# Altium PCB Steering Wheel R3.PcbDoc
Units mm, origin at the board's own origin, x right, y up, seen from the top; angles counter-clockwise.
Board outline 99.95 x 50.04 mm, 4 copper layers (Top Layer, Int1 (GND), Int2 (PWR), Bottom Layer), stack 1.369 mm thick; 92 components, 74 nets, 314 pads, 8 vias.
Unrouted connection lines stored in the file: 151.
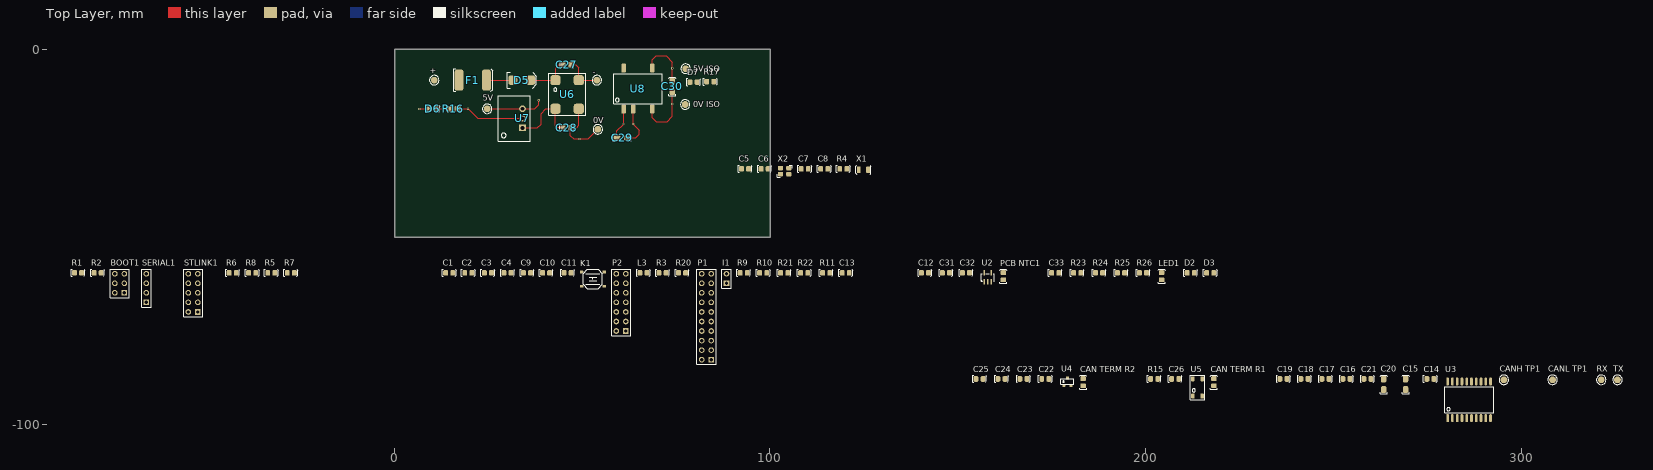
[diagram p0: Top Layer view]
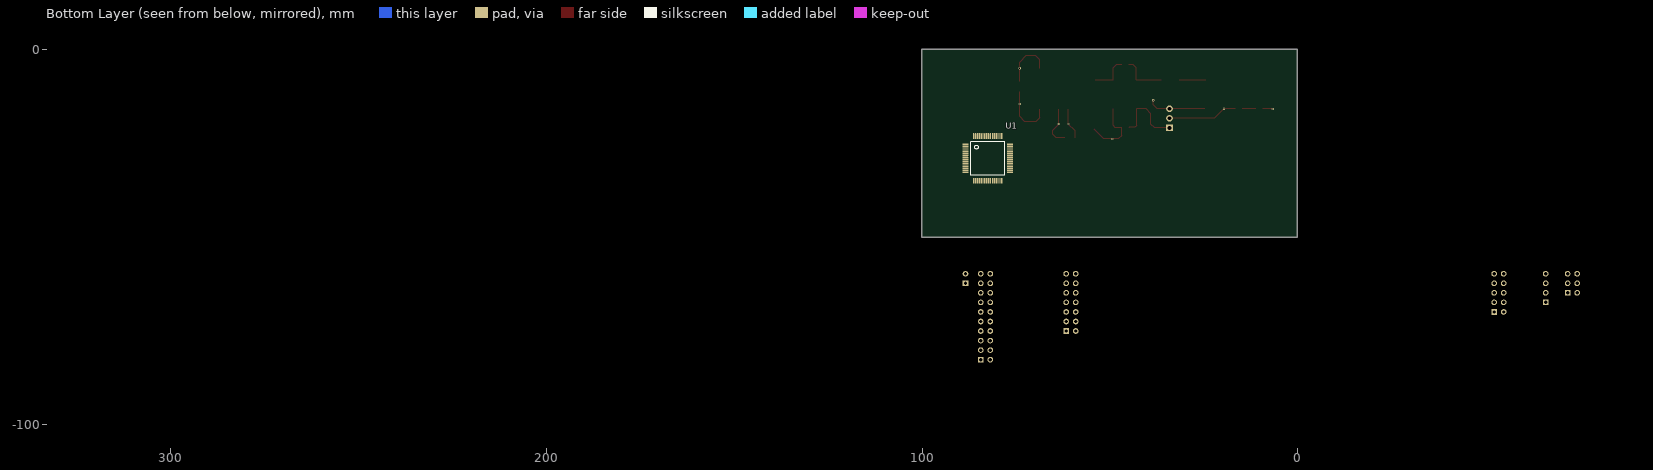
[diagram p1: Bottom Layer view, seen from below]
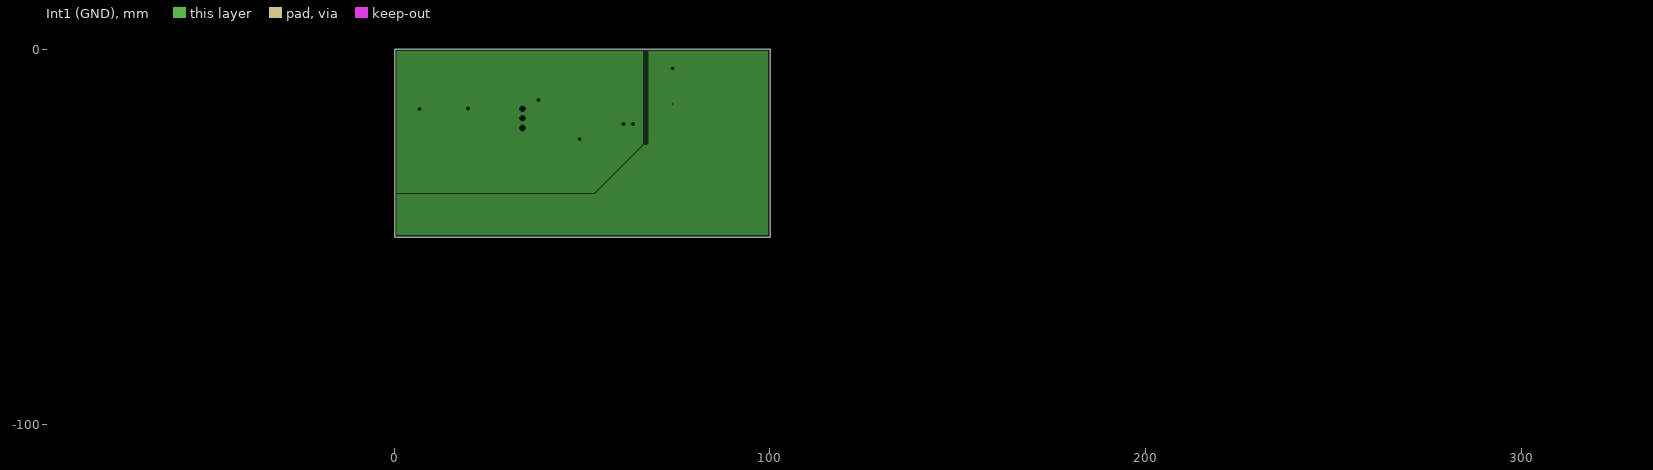
[diagram p2: Int1 (GND), clearances drawn from the general rule]
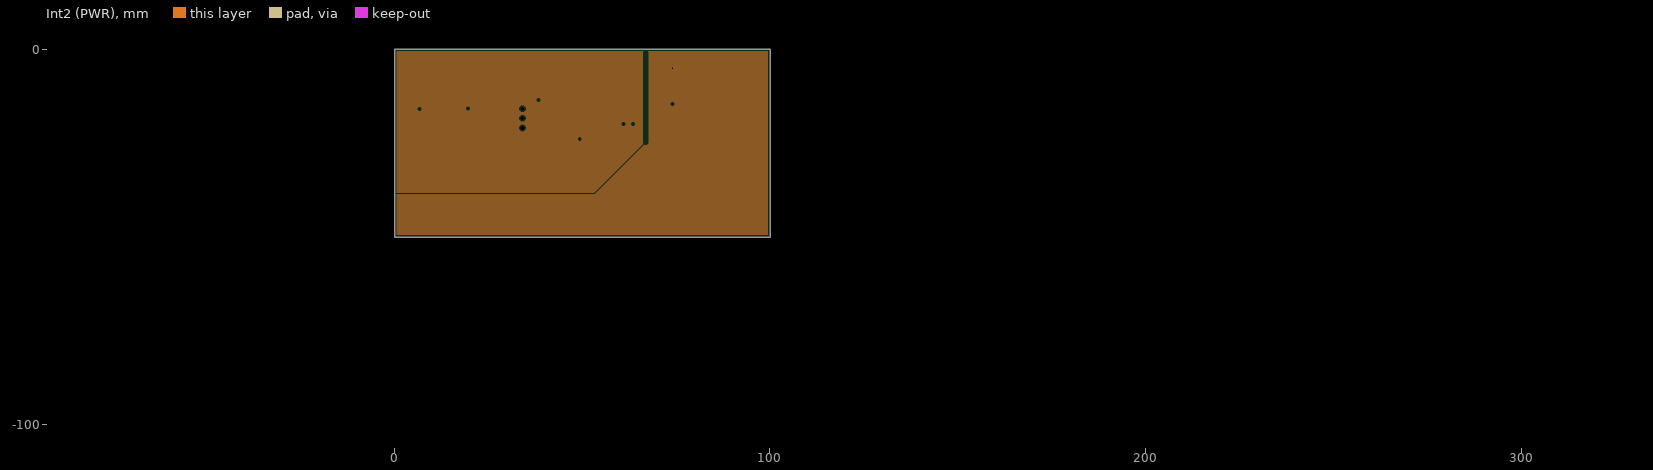
[diagram p3: Int2 (PWR), clearances drawn from the general rule]

## Layer stack, top to bottom
Top Solder: solder mask 0.0254, SM-001, Dk 4
Top Layer: signal copper 0.035
Dielectric 1: prepreg 0.1295, PP-017, Dk 4.3
Dielectric 2: prepreg 0.1295, PP-017, Dk 4.3
Int1 (GND): plane copper 0.035, net 0V (ISO)
Dielectric 3: core 0.7112, Core-039, Dk 4.8
Int2 (PWR): plane copper 0.035, net 5V (ISO)
Dielectric 4: prepreg 0.1295, PP-017, Dk 4.3
Dielectric 5: prepreg 0.1295, PP-017, Dk 4.3
Bottom Layer: signal copper 0.035
Bottom Solder: solder mask 0.0254, SM-001, Dk 4

## Board outline
0.127,-50.038 0.127,0 100.076,0 100.076,-50.038

## Design rules (kind name [scope] priority, off if disabled: settings)
Clearance [All] p1: gap=0.254 ignorepadtopadclearanceinfootprint=FALSE except(0: Arc-Hole Track-Hole SMDPad-Hole THPad-Hole Via-Hole Fill-Hole Poly-Hole Region-Hole Text-Hole; 0.1: THPad-THPad; 0.152: Arc-SMDPad Track-SMDPad SMDPad-SMDPad; 0.2: Arc-THPad Track-THPad SMDPad-THPad THPad-Via; 0.203: Arc-Arc Arc-Track Arc-Region Track-Track Track-Region SMDPad-Region THPad-Region Via-Region Fill-Region Poly-Region Region-Region; 0.6: Arc-Poly Track-Poly SMDPad-Poly THPad-Poly Via-Poly Fill-Poly Poly-Poly)
Height [All] p1: minheight=0 maxheight=50 prefheight=12.7
HoleSize [All] p1: absolutevalues=TRUE maxlimit=10 minlimit=0.025 maxpercent=80.000 minpercent=20.000
PlaneClearance [All] p1: clearance=0.4
PlaneConnect [All] p1: pad.planeconnectstyle=Relief pad.reliefexpansion=0.508 pad.reliefentries=4 pad.reliefconductorwidth=0.8 pad.reliefairgap=0.254 via.planeconnectstyle=Direct via.reliefexpansion=0.508 via.reliefentries=4 via.reliefconductorwidth=0.8 via.reliefairgap=0.254
PolygonConnect [All] p1: thpad.connectstyle=Relief thpad.reliefconductorwidth=0.6 thpad.reliefentries=4 thpad.polygonreliefangle="90 Angle" thpad.airgapwidth=0.254 smdpad.connectstyle=Relief smdpad.reliefconductorwidth=0.6 smdpad.reliefentries=4 smdpad.polygonreliefangle="90 Angle" smdpad.airgapwidth=0.254 via.connectstyle=Direct via.reliefconductorwidth=0.6 via.reliefentries=4 via.polygonreliefangle="90 Angle" via.airgapwidth=0.254
RoutingVias [All] p1: holewidth=0.711 width=1.27 viastyle="Through Hole" minholewidth=0.203 minwidth=0.254 maxholewidth=0.711 maxwidth=1.27
SolderMaskExpansion [All] p1: expansion=0.051 istentingtop=FALSE
Width [All] p1: maxlimit=3 minlimit=0.127 preferedwidth=0.5
26 further rules are at their usual default settings.

## Classes and differential pairs
net class MICROCONTROLLER: "0V (ISO)" "0V (ISO) (Crystal HS)" "0V (ISO) (Crystal LS)" "3.3V (ISO)" "5V (ISO)" BOOT0 BOOT1 "CAN RX" "CAN RX INDC" "CAN TX" "CAN TX INDC" GPIO1 GPIO2 GPIO3 GPIO4 GPIO5 GPIO6 GPIO7 GPIO8 GPIO9 GPIO10 GPIO11 GPIO12 GPIO13 GPIO14 GPIO15 GPIO16 GPIO17 NetC6_2 NetC9_2 NetC10_2 NetC13_2 NetD2_K NetD3_K NetK1_1 NetK1_3 NetL3_1 NetLED1_K NetR11_1 NetR20_2 NetSTLINK1_5 NetU1_2 NetU1_8 NetU1_9 NetU1_10 NetU1_11 NetU1_15 NetU1_20 NetU1_22 NetU1_23 NetU1_24 NetU1_25 NetU1_29 NetU1_37 NetU1_38 NetU1_39 NetU1_40 NetU1_41 NetU1_42 NetU1_43 NetU1_44 NetU1_45 NetU1_50 NetU1_51 NetU1_52 NetU1_53 NetU1_54 NetU1_55 NetU1_56 NetU1_62 NRST PA5 "PCB TEMP" SCL SDA SPI_MISO SPI_MOSI SPI_NSS SPI_SCLK SWCLK SWDIO UARTRX UARTTX XTALA XTALB XTALC XTALD
component class "Power Source": 0V "0V ISO" 5V "5V ISO" + - C27 C28 C29 C30 D5 D6 D7 F1 R16 R17 U6 U7 U8
component class Micro: BOOT1 C1 C2 C3 C4 C5 C6 C7 C8 C9 C10 C11 C12 C13 C31 C32 C33 D2 D3 I1 K1 L3 LED1 P1 P2 "PCB NTC1" R1 R2 R3 R4 R5 R6 R7 R8 R9 R10 R11 R20 R21 R22 R23 R24 R25 R26 SERIAL1 STLINK1 U1 U2 X1 X2
component class CAN: C14 C15 C16 C17 C18 C19 C20 C21 C22 C23 C24 C25 C26 "CAN TERM R1" "CAN TERM R2" "CANH TP1" "CANL TP1" R15 RX TX U3 U4 U5

## Components (designator, comment, footprint, x,y, rotation, side; value= is the part's Value field where it differs from the comment)
0V "0mm" "SMD Test Point" 54.229,-21.336 r0 top
"0V ISO" "0mm" "SMD Test Point" 77.47,-14.732 r90 top
5V "0mm" "SMD Test Point" 24.765,-15.875 r0 top
"5V ISO" "0mm" "SMD Test Point" 77.597,-5.207 r90 top
+ "0mm" "SMD Test Point" 10.668,-8.255 r0 top
- "0mm" "SMD Test Point" 53.975,-8.255 r0 top
BOOT1 "2.54mm" "TH 2.54mm Header 2x3" -71.809,-64.871 r90 top
C1 "100nF" 0805 14.678,-59.537 r0 top
C2 "100nF" 0805 19.758,-59.537 r0 top
C3 "100nF" 0805 24.965,-59.537 r0 top
C4 "100nF" 0805 30.172,-59.537 r0 top
C5 "12pF" 0805 93.418,-31.851 r0 top
C6 "12pF" 0805 98.625,-31.851 r0 top
C7 "22pF" 0805 109.293,-31.851 r0 top
C8 "22pF" 0805 114.5,-31.851 r0 top
C9 "2.2uF" 0805 35.379,-59.537 r0 top
C10 "2.2uF" 0805 40.459,-59.537 r0 top
C11 "1uF" 0805 46.174,-59.537 r0 top
C12 "1uF" 0805 141.297,-59.537 r0 top
C13 "22uF" 0805 120.215,-59.537 r0 top
C14 "100nF" 0805 275.844,-87.757 r0 top
C15 "10nF" 1206 269.24,-88.011 r90 top
C16 "100nF" 0805 253.492,-87.757 r0 top
C17 "10uF" 0805 247.904,-87.757 r0 top
C18 "100nF" 0805 242.316,-87.757 r0 top
C19 "10uF" 0805 236.728,-87.757 r0 top
C20 "10nF" 1206 263.398,-88.011 r90 top
C21 "100nF" 0805 259.08,-87.757 r0 top
C22 "100pF" 0805 173.355,-87.757 r0 top
C23 "100pF" 0805 167.513,-87.757 r0 top
C24 "100pF" 0805 161.671,-87.757 r0 top
C25 "100pF" 0805 155.829,-87.757 r0 top
C26 "22pF" 0805 207.899,-87.757 r0 top
C27 "10uF" 0805 45.974,-4.191 r180 top
C28 "10uF" 0805 45.92,-20.929 r180 top
C29 "22uF" 1206 61.909,-23.622 r0 top
C30 "22uF" 1206 74.041,-8.703 r90 top
C31 "100nF" 0805 146.885,-59.537 r0 top
C32 "1uF" 0805 152.219,-59.537 r0 top
C33 "100nF" 0805 175.968,-59.537 r0 top
"CAN TERM R1" "56R" 0805 218.186,-88.646 r90 top
"CAN TERM R2" "56R" 0805 183.388,-88.646 r90 top
"CANH TP1" "0mm" "SMD Test Point" 295.402,-88.011 r90 top
"CANL TP1" "0mm" "SMD Test Point" 308.356,-88.011 r90 top
D2 "Blue" "0805 LED" 212.036,-59.537 r0 top
D3 "Blue" "0805 LED" 217.243,-59.537 r0 top
D5 "SD560BTR" "SMB Diode" 31.877,-8.255 r0 top
D6 "Red" "0805 LED" 10.287,-15.875 r0 top
D7 "Red" "0805 LED" 79.707,-8.737 r0 top
F1 "0ZCF0100AF2A" 2920 17.272,-8.255 r0 top
I1 "2.54mm" "TH 2.54mm Header 1x2" 88.465,-62.331 r90 top
K1 "TS-1187A-C-D-B" "XKB SW-4.5" 52.905,-61.188 r0 top
L3 "Ferrite" 0805 66.367,-59.537 r0 top
LED1 "Yellow" "0805 LED" 204.289,-60.426 r90 top
P1 "2.54mm" "TH 2.54mm Header 2x10" 84.401,-82.651 r90 top
P2 "2.54mm" "TH 2.54mm Header 2x7" 61.668,-75.031 r90 top
"PCB NTC1" "10K (NTC) (B25/85 3430K)" 0805 162.125,-60.426 r90 top
R1 "0R" 0805 -84.128,-59.537 r0 top
R2 "0R" 0805 -78.921,-59.537 r0 top
R3 "51k" 0805 71.447,-59.537 r0 top
R4 "0R" 0805 119.58,-31.851 r0 top
R5 "0R" 0805 -32.693,-59.537 r0 top
R6 "0R" 0805 -42.98,-59.537 r0 top
R7 "0R" 0805 -27.486,-59.537 r0 top
R8 "0R" 0805 -37.773,-59.537 r0 top
R9 "3.3k" 0805 93.037,-59.537 r0 top
R10 "3.3k" 0805 98.244,-59.537 r0 top
R11 "10k" 0805 115.008,-59.537 r0 top
R15 "0R" 0805 202.311,-87.757 r0 top
R16 "680R" 0805 15.748,-15.875 r180 top
R17 "510R" 0805 84.152,-8.61 r0 top
R20 "10k" 0805 76.654,-59.537 r0 top
R21 "3.3k" 0805 103.832,-59.537 r0 top
R22 "3.3k" 0805 109.166,-59.537 r0 top
R23 "2.2k" 0805 181.81,-59.537 r0 top
R24 "2.2k" 0805 187.652,-59.537 r0 top
R25 "2.2k" 0805 193.494,-59.537 r0 top
R26 "10k" 0805 199.336,-59.537 r0 top
RX "0mm" "SMD Test Point" 321.31,-88.011 r0 top
SERIAL1 "2.54mm" "TH 2.54mm Header 1x4" -65.967,-67.411 r90 top
STLINK1 "2.54mm" "TH 2.54mm Header 2x5" -52.251,-69.951 r90 top
TX "0mm" "SMD Test Point" 325.628,-88.011 r0 top
U1 "STM32F446RET6" "STM 64-LQFP" 82.55,-29.083 r180 bottom
U2 "RT9193-33GB" "RICHTEK SOT-23-5" 158.061,-60.934 r0 top
U3 "ADM3053" "AD SOIC-W 20" 286.131,-93.345 r0 top
U4 "NUP2105L" "ON SOT-23" 179.197,-88.519 r0 top
U5 "B82787C0104H002" "TDK 4-PC Pad" 212.598,-92.329 r90 top
U6 "744272121" "Wurth 4-PC Pad" 49.149,-15.875 r90 top
U7 "R-78C5.0-1.0" "RECOM 3-SIP" 34.163,-20.955 r90 top
U8 "R2S-0505/HP" "RECOM 8-SMD (5 Pin)" 64.897,-10.541 r0 top
X1 "32.768kHz" "EPSON 2-SMD" 124.914,-32.105 r0 top
X2 "16MHz" "Abracon 4-SMD 3.2x2.5" 103.959,-32.486 r0 top

## Footprints (in the part's own frame and the unit in brackets; to place one, negate y for a bottom-side part, rotate by r counter-clockwise, add the part's x,y. Pads: shape width x height; smd on the part's side, far side on the other; paste and mask are expansions set on the pad)
0805 [mm]
  rrect50% 1.3x1.5 smd: 1(-0.962,-0.026) 2(0.938,-0.026)
  silkscreen extent -1.85,-0.95 1.8,0.93, body extent -1,-0.65 1,0.66, height 0.73
"0805 LED" [mm]
  rrect50% 1.3x1.5 smd: A(-0.962,-0.026) K(0.938,-0.026)
  silkscreen extent -1.85,-0.95 1.8,0.93, body extent -1.1,-0.62 0.9,0.62, height 1
1206 [mm]
  rrect50% 1.8x1.4 smd: 1(-2.6,0) 2(0.2,0)
  silkscreen extent -3.7,-0.9 1.2,0.9, body extent -2.9,-0.9 0.5,0.9, height 1.85
2920 [mm]
  rrect50% 2.3x5.6 smd: 1(0,0) 2(7.3,0)
  silkscreen extent -1.4,-3 9,3, body extent -0.34,-2.81 7.64,2.81, height 1.14
"Abracon 4-SMD 3.2x2.5" [mm]
  rrect50% 1.4x1.2 smd: 1(-1.1,-0.8) 2(1.1,0.8) GND(-1.1,0.8) GND(1.1,-0.8)
  silkscreen extent -2.02,-1.6 2,1.61, body extent -1.6,-1.25 1.6,1.25, height 0.8
"AD SOIC-W 20" [mil]
  rrect50% 28x85 smd: 1(-225,-192.02)
  oval 28x85 smd: 2(-175,-192.02) 3(-125,-192.02) 4(-75,-192.02) 5(-25,-192.02) 6(25,-192.02) 7(75,-192.02) 8(125,-192.02) 9(175,-192.02) 10(225,-192.02) 11(225,192.02) 12(175,191.98) 13(125,191.98) 14(75,191.98) 15(25,191.98) 16(-25,191.98) 17(-75,191.98) 18(-125,191.98) 19(-175,191.98) 20(-225,191.98)
  silkscreen extent -257,-138 256,138, body extent -260,-210 260,210, height 105
"EPSON 2-SMD" [mm]
  rrect50% 1x1.8 smd: 1(-1.25,0) 2(1.25,0)
  silkscreen extent -2,-1.2 2,1.2, body extent -1.5,-1 1.5,1, height 1
"ON SOT-23" [mm] "NUP2105L"
  rrect50% 0.8x0.9 smd: 1(-0.95,-1) 2(0.95,-1) 3(0,1)
  silkscreen extent -1.75,-0.65 1.75,0.75, body extent -1.5,-1.27 1.5,1.28, height 1
"RECOM 3-SIP" [mm] "12 to 42 Vdc In, 9 Vdc Out"
  rect 1.75x1.75 hole 1: 1(0,0)
  round 1.75 hole 1: 2(2.54,0) 3(5.08,0)
  silkscreen extent -3.5,-2 8.5,6.5, body extent -3.26,-2.02 8.34,6.48, height 11.41
"RECOM 8-SMD (5 Pin)" [mm]
  rrect50% 1.2x2.4 smd: 1(-3.81,-5.4) 2(-1.27,-5.4) 4(3.81,-5.4) 5(3.81,5.5) 8(-3.81,5.5)
  silkscreen extent -6.5,-4 6.5,4, body extent -6.37,-5.55 6.38,5.55, height 9.2
"RICHTEK SOT-23-5" [mil]
  rrect50% 19x58 smd: 1(-39.37,-39.37) 2(-1.97,-39.37) 3(35.43,-39.37) 4(35.43,53.63) 5(-39.37,53.63)
  silkscreen extent -69,-31 64,47, body extent -62,-51 58,67, height 57
"SMB Diode" [mm]
  rrect50% 2.5x2.5 smd: A(-0.25,0) K(4.45,0)
  silkscreen extent -1.75,-2.1 6,2.1, body extent -0.69,-1.97 4.9,1.97, height 2.5
"SMD Test Point" [mm]
  round 1.8 smd: 1(0,0)
  silkscreen extent -1.27,-1.27 1.27,1.27
"STM 64-LQFP" [mm]
  rrect50% 1.56x0.35 smd mask+0.05: 1(-5.93,3.75) 2(-5.93,3.25) 3(-5.93,2.75) 4(-5.93,2.25) 5(-5.93,1.75) 6(-5.93,1.25) 7(-5.93,0.75) 8(-5.93,0.25) 9(-5.93,-0.25) 10(-5.93,-0.75) 11(-5.93,-1.25) 12(-5.93,-1.75) 13(-5.93,-2.25) 14(-5.93,-2.75) 15(-5.93,-3.25) 16(-5.93,-3.75) 33(5.93,-3.75) 34(5.93,-3.25) 35(5.93,-2.75) 36(5.93,-2.25) 37(5.93,-1.75) 38(5.93,-1.25) 39(5.93,-0.75) 40(5.93,-0.25) 41(5.93,0.25) 42(5.93,0.75) 43(5.93,1.25) 44(5.93,1.75) 45(5.93,2.25) 46(5.93,2.75) 47(5.93,3.25) 48(5.93,3.75)
  rrect50% 0.35x1.56 smd mask+0.05: 17(-3.75,-5.93) 18(-3.25,-5.93) 19(-2.75,-5.93) 20(-2.25,-5.93) 21(-1.75,-5.93) 22(-1.25,-5.93) 23(-0.75,-5.93) 24(-0.25,-5.93) 25(0.25,-5.93) 26(0.75,-5.93) 27(1.25,-5.93) 28(1.75,-5.93) 29(2.25,-5.93) 30(2.75,-5.93) 31(3.25,-5.93) 32(3.75,-5.93) 49(3.75,5.93) 50(3.25,5.93) 51(2.75,5.93) 52(2.25,5.93) 53(1.75,5.93) 54(1.25,5.93) 55(0.75,5.93) 56(0.25,5.93) 57(-0.25,5.93) 58(-0.75,5.93) 59(-1.25,5.93) 60(-1.75,5.93) 61(-2.25,5.93) 62(-2.75,5.93) 63(-3.25,5.93) 64(-3.75,5.93)
  silkscreen extent -4.5,-4.5 4.5,4.5, body extent -6,-6 6,6, height 1.63
"TDK 4-PC Pad" [mm]
  rrect50% 1.35x0.9 smd: 1(0,0) 2(0,-2.5) 3(4.55,-2.5) 4(4.55,0)
  silkscreen extent -1,-3.2 5.5,0.7, body extent -0.02,-2.82 4.48,0.38, height 2.8
"TH 2.54mm Header 1x2" [mm]
  rect 1.5x1.5 hole 0.9: 1(0,0)
  round 1.5 hole 0.9: 2(2.54,0)
  silkscreen extent -1.27,-1.27 3.81,1.27, body extent -1.27,-1.27 3.81,1.27, height 9.5
"TH 2.54mm Header 1x4" [mm]
  rect 1.5x1.5 hole 0.9: 1(0,0)
  round 1.5 hole 0.9: 2(2.54,0) 3(5.08,0) 4(7.62,0)
  silkscreen extent -1.27,-1.27 8.89,1.27, body extent -1.27,-1.27 8.89,1.27, height 9.5
"TH 2.54mm Header 2x3" [mm]
  rect 1.5x1.5 hole 0.9: 1(0,0)
  round 1.5 hole 0.9: 2(0,2.54) 3(2.54,0) 4(2.54,2.54) 5(5.08,0) 6(5.08,2.54)
  silkscreen extent -1.27,-1.27 6.35,3.81, body extent -1.27,-1.27 6.35,3.81, height 9.5
"TH 2.54mm Header 2x5" [mm]
  rect 1.5x1.5 hole 0.9: 1(0,0)
  round 1.5 hole 0.9: 2(0,2.54) 3(2.54,0) 4(2.54,2.54) 5(5.08,0) 6(5.08,2.54) 7(7.62,0) 8(7.62,2.54) 9(10.16,0) 10(10.16,2.54)
  silkscreen extent -1.27,-1.27 11.43,3.81, body extent -1.27,-1.27 11.43,3.81, height 9.5
"TH 2.54mm Header 2x7" [mm]
  rect 1.5x1.5 hole 0.9: 1(0,0)
  round 1.5 hole 0.9: 2(0,2.54) 3(2.54,0) 4(2.54,2.54) 5(5.08,0) 6(5.08,2.54) 7(7.62,0) 8(7.62,2.54) 9(10.16,0) 10(10.16,2.54) 11(12.7,0) 12(12.7,2.54) 13(15.24,0) 14(15.24,2.54)
  silkscreen extent -1.27,-1.27 16.51,3.81, body extent -1.27,-1.27 16.51,3.81, height 9.5
"TH 2.54mm Header 2x10" [mm]
  rect 1.5x1.5 hole 0.9: 1(0,0)
  round 1.5 hole 0.9: 2(0,2.54) 3(2.54,0) 4(2.54,2.54) 5(5.08,0) 6(5.08,2.54) 7(7.62,0) 8(7.62,2.54) 9(10.16,0) 10(10.16,2.54) 11(12.7,0) 12(12.7,2.54) 13(15.24,0) 14(15.24,2.54) 15(17.78,0) 16(17.78,2.54) 17(20.32,0) 18(20.32,2.54) 19(22.86,0) 20(22.86,2.54)
  silkscreen extent -1.27,-1.27 24.13,3.81, body extent -1.27,-1.27 24.13,3.81, height 9.5
"Wurth 4-PC Pad" [mm]
  rrect50% 2.7x2.7 smd: 1(7.62,6.22) 2(0,6.22) 3(0,0) 4(7.62,0)
  silkscreen extent -1.7,-1.8 9.4,8, body extent -1.19,-1.24 8.81,7.46, height 6.2
"XKB SW-4.5" [mm]
  rrect50% 1x0.75 smd: 1(-3,-1.9) 2(3,-1.9) 3(-3,1.85) 4(3,1.85)
  silkscreen extent -2.55,-2.55 2.55,2.55, body extent -3,-2.55 3,2.55, height 1.35

## Part data
0V "0V ISO" 5V "5V ISO" + - "CANH TP1" "CANL TP1" RX TX: library part "SMD Test Point", Angle=0, Contact=NA, Flange=No, Part Number="SMD Test Point", Pitch=0mm, Positions=1, Row Spacing=0
BOOT1: library part "TH 2.54mm Header 2x3", Angle=0, Contact=NA, Flange=No, Part Number="TH 2.54mm Header 2x3", Pitch=2.54mm, Positions=6, Row Spacing=2.54mm
C1 C2 C3 C4: library part GCM21BR71H104KA37L, Digikey Part Number=490-6064-1-ND, Manufacturer=muRata, Rated Voltage=50V, Tolerance=±10%, Material=X7R, Part Number=GCM21BR71H104KA37L
C5 C6: library part GCM21B5c1H120JA37L, Digikey Part Number="DO NOT USE FOR NEW DESIGNS", Manufacturer=muRata, Rated Voltage=50V, Tolerance=5%, Material=C0G, Part Number=GCM21B5c1H120JA37L
C7 C8: library part GRM21A5C2E220JW01D, Digikey Part Number=490-5534-1-ND, Manufacturer=muRata, Rated Voltage=250V, Tolerance=±5%, Material="C0G, NP0", Part Number=GRM21A5C2E220JW01D
C9 C10: library part GCM21BR61C225KA37L, Digikey Part Number="DO NOT USE FOR NEW DESIGNS", Manufacturer=muRata, Rated Voltage=16V, Tolerance=10%, Material=X5R, Part Number=GCM21BR61C225KA37L
C11 C12 C32: library part AC0805KKX7R8BB105, Digikey Part Number="DO NOT USE FOR NEW DESIGNS", Manufacturer=YAGEO, Rated Voltage=25V, Tolerance=10%, Material=X7R, Part Number=AC0805KKX7R8BB105
C13: library part GRM21BR61A226ME51L, Digikey Part Number=490-10511-1-ND, Manufacturer=muRata, Rated Voltage=10V, Tolerance=20%, Material=X5R, Part Number=GRM21BR61A226ME51L
C14 C16 C18 C21 C31 C33: library part GCM21BR71E104KA37L, Digikey Part Number="DO NOT USE FOR NEW DESIGNS", Manufacturer=muRata, Rated Voltage=25V, Tolerance=10%, Material=X7R, Part Number=GCM21BR71E104KA37L
C15 C20: library part GCM3195C2A103JA16D, Digikey Part Number=490-4978-2-ND, Manufacturer=muRata, Rated Voltage=100V, Tolerance=5%, Material=Ceramic, Part Number=GCM3195C2A103JA16D
C17 C19 C27 C28: library part GRM21BR6YA106KE43L, Digikey Part Number=490-10514-6-ND, Manufacturer=muRata, Rated Voltage=50V, Tolerance=10%, Material=X5R, Part Number=GRM21BR6YA106KE43L
C22 C23 C24 C25: library part GCM21B5C1H101JA37L, Digikey Part Number="DO NOT USE FOR NEW DESIGNS", Manufacturer=muRata, Rated Voltage=50V, Tolerance=5%, Material=C0G, Part Number=GCM21B5C1H101JA37L
C26: library part GCM21B5C1H220JA37L, Digikey Part Number="DO NOT USE FOR NEW DESIGNS", Manufacturer=muRata, Rated Voltage=50V, Tolerance=5%, Material=C0G, Part Number=GCM21B5C1H220JA37L
C29 C30: library part CC1206MKX5R7BB226, Digikey Part Number=311-1997-2-ND, Manufacturer=YAGEO, Rated Voltage=16V, Tolerance=20%, Material=Ceramic, Part Number=CC1206MKX5R7BB226
"CAN TERM R1" "CAN TERM R2": library part RC0805FR0756RL, Digikey Part Number=311-56.0CRCT-ND, Manufacturer=YAGEO, Rated Voltage=0.125W, Tolerance=0.01, Material=FR-07, Part Number=RC0805FR0756RL
D2 D3: library part SML-MN2BCTT86C, "LED BLUE CLEAR 2012 SMD", Digikey Part Number=846-1207-1-ND, Manufacturer="ROHM Semiconductor", Colour=Blue, Digikey Link=https://www.digikey.com/product-detail/en/rohm-semiconductor/SMLMN2BCTT86C/846-1207-1-ND/6057239, Part Number=SML-MN2BCTT86C
D5: "1.2V_F 600V 5A SMB", Digikey Part Number=1655-1530-2-ND, Manufacturer="SMC Diode Solutions", Digikey Link=https://www.digikey.com/product-detail/en/smc-diode-solutions/SD560BTR/1655-1530-2-ND/6022620, Part Number=SD560BTR
D6 D7: library part SML-210LTT86, "Red LED Indication - Discrete 1.75V 0805 (2012 Metric)", Digikey Part Number=511-1286-1-ND, Manufacturer="ROHM Semiconductor", Colour=Red, Digikey Link=https://www.digikey.com/product-detail/en/rohm-semiconductor/SML-210LTT86/511-1286-1-ND/637099, Part Number=SML-210LTT86
F1: "PTC RESET FUSE 60V 1A 292", Digikey Part Number=507-2070-1-ND, Manufacturer="Littelfuse Inc.", Digikey Link=https://www.digikey.com/product-detail/en/bel-fuse-inc/0ZCF0100AF2A/507-2070-1-ND/6210547, Part Number=0ZCF0100AF2A
I1: library part "TH 2.54mm Header 1x2", Angle=0, Contact=NA, Flange=No, Part Number="TH 2.54mm Header 1x2", Pitch=2.54mm, Positions=2, Row Spacing=2.54mm
K1: "TACTILE SWITCHES SPST 5.10MM X 5.10MM 0.80MM SMD ROHS", Manufacturer="XKB Enerprise", Link=https://jlcpcb.com/client/index.html#/parts/componentSearch?searchTxt=usb, Part Number=TS-1187A-C-D-B
L3: library part MMZ2012Y202BTD25, Digikey Part Number=445-172872-1-ND, Manufacturer="TDK Corportation", Rated Current=400mA, Impedence="2 kOhms @ 100MHz", Material="Ferrite Bead", Part Number=MMZ2012Y202BTD25
LED1: library part SML-211YTT86, "Yellow LED Indication - Discrete 1.75V 0805 (2012 Metric)", Digikey Part Number=511-1293-1-ND, Manufacturer="ROHM Semiconductor", Colour=Yellow, Digikey Link=https://www.digikey.com/product-detail/en/rohm-semiconductor/SML-211YTT86/511-1293-1-ND/637106, Part Number=SML-211YTT86
P1: library part "TH 2.54mm Header 2x10", Angle=0, Contact=NA, Flange=No, Part Number="TH 2.54mm Header 2x10", Pitch=2.54mm, Positions=20, Row Spacing=2.54mm
P2: library part "TH 2.54mm Header 2x7", Angle=0, Contact=NA, Flange=No, Part Number="TH 2.54mm Header 2x7", Pitch=2.54mm, Positions=14, Row Spacing=2.54mm
"PCB NTC1": library part NTCS0805E3103FLT, Digikey Part Number=BC2733CT-ND, Manufacturer="Vishay Beyschlag", Rated Voltage=210mW, Tolerance=0.01, Part Number=NTCS0805E3103FLT
R1 R2 R4 R5 R6 R7 R8 R15: library part RC0805FR070RL, Digikey Part Number=311-0.0CRCT-ND, Manufacturer=YAGEO, Rated Voltage=0.125W, Tolerance=0.01, Material=FR-07, Part Number=RC0805FR070RL
R3: library part RC0805FR0751KL, Digikey Part Number=311-51.0KCRCT-ND, Manufacturer=YAGEO, Rated Voltage=0.125W, Tolerance=0.01, Material=FR-07, Part Number=RC0805FR0751KL
R9 R10 R21 R22: library part RC0805FR073K3L, Digikey Part Number=311-3.30KCRCT-ND, Manufacturer=YAGEO, Rated Voltage=0.125W, Tolerance=0.01, Material=FR-07, Part Number=RC0805FR073K3L
R11 R20 R26: library part RC0805FR0710KL, Digikey Part Number=311-10.0KCRCT-ND, Manufacturer=YAGEO, Rated Voltage=0.125W, Tolerance=0.01, Material=FR-07, Part Number=RC0805FR0710KL
R16: library part RC0805FR07680RL, Digikey Part Number=311-680CRCT-ND, Manufacturer=YAGEO, Rated Voltage=0.125W, Tolerance=0.01, Material=FR-07, Part Number=RC0805FR07680RL
R17: library part RC0805FR07510RL, Digikey Part Number=311-510CRCT-ND, Manufacturer=YAGEO, Rated Voltage=0.125W, Tolerance=0.01, Material=FR-07, Part Number=RC0805FR07510RL
R23 R24 R25: library part RC0805FR072K2L, Digikey Part Number=311-2.20KCRCT-ND, Manufacturer=YAGEO, Rated Voltage=0.125W, Tolerance=0.01, Material=FR-07, Part Number=RC0805FR072K2L
SERIAL1: library part "TH 2.54mm Header 1x4", Angle=0, Contact=NA, Flange=No, Part Number="TH 2.54mm Header 1x4", Pitch=2.54mm, Positions=4, Row Spacing=2.54mm
STLINK1: library part "TH 2.54mm Header 2x5", Angle=0, Contact=NA, Flange=No, Part Number="TH 2.54mm Header 2x5", Pitch=2.54mm, Positions=10, Row Spacing=2.54mm
U1: "ARM® Cortex®-M4 STM32F4 Microcontroller IC 32-Bit 180MHz 512KB (512K x 8) FLASH 64-LQFP (10x10)", Digikey Part Number=497-15376-ND, Manufacturer=STMicroelectronics, Digikey Link=https://www.digikey.com.au/product-detail/en/stmicroelectronics/STM32F446RET6/497-15376-ND/5175962, Part Number=STM32F446RET6
U2: library part CMP-034-000000-1, "Linear Voltage Regulator IC 1 Output 300mA SOT-23-5", Part Number=RT9193-33GB
U3: "Isolated CAN Transceiver", Digikey Part Number=ADM3053BRWZ-ND, Manufacturer="Analogue Devices", Digikey Link=https://www.digikey.com/product-detail/en/analog-devices-inc/ADM3053BRWZ/ADM3053BRWZ-ND/2709332, Part Number=ADM3053
U4: "Dual Line CAN Bus Protector", Digikey Part Number=NUP2105LT1GOSCT-ND, Manufacturer="ON Semiconductor", Digikey Link=https://www.digikey.com/product-detail/en/on-semiconductor/NUP2105LT1G/NUP2105LT1GOSCT-ND/1485001, Part Number=NUP2105L
U5: "100µH @ 100kHz 2 Line Common Mode Choke Surface Mount 5.8 kOhms @ 10MHz 150mA DCR 2Ohm", Digikey Part Number=495-4598-1-ND, Inductance="100µH @ 100kHz", Manufacturer="EPCOS (TDK)", Rated Current=150mA, Digikey Link=https://www.digikey.com/product-detail/en/epcos-tdk/B82787C0104H002/495-4598-2-ND/3680998, Impedence="5.8 kOhms @ 10MHz", Material=Wirewound, Part Number=B82787C0104H002
U6: "120µH @ 100kHz 2 Line Common Mode Choke Surface Mount 460 Ohms @ 30MHz 2.5A DCR 25mOhm", Digikey Part Number=732-1489-1-ND, Inductance="120uH @ 100kHz", Manufacturer="Wurth Electronics Inc", Rated Current=2.5A, Digikey Link=https://www.digikey.com/product-detail/en/w-rth-elektronik/744272121/732-1489-1-ND/1639501, Impedence="460 Ohms @ 30MHz", Material=Wirewound, Part Number=744272121
U7: "CONV DC/DC 1A 5V OUT SIP VERT", Digikey Part Number=945-1395-5-ND, Manufacturer=Recom, Digikey Link=https://www.digikey.com.au/product-detail/en/recom-power/R-78C5.0-1.0/945-1395-5-ND/2652148, Isolation=Non-Isolated, Part Number=R-78C5.0-1.0
U8: "Isolated Module DC DC Converter 1 Output 3.3V 606mA 4.5V - 5.5V Input", Digikey Part Number=945-1764-5-ND, Input Voltage=4.5V-5.5V, Manufacturer=Recom, Output Power=2W, Output Voltage=5V, Digikey Link=https://www.digikey.com/product-detail/en/recom-power/R2S-0505-HP/945-1764-5-ND/2302761, Efficiency=0.85, Isolation=Isolated, Part Number=R2S-0505/HP
X1: library part "FC-135 32.7680KA-A5", Digikey Part Number=SER4103TR-ND, Load Capacitance=12.5pF, Manufacturer=EPSON, Digikey Link=https://www.digikey.com/product-detail/en/epson/FC-135-32.7680KA-A5/SER4103TR-ND/5259895, ESR=70k, Part Number="FC-135 32.7680KA-A5"
X2: library part ABM8AIG-16.000MHZ-12-2Z-T3, Digikey Part Number=535-13386-1-ND, Load Capacitance=12pF, Manufacturer="Abracon LLC", Digikey Link=https://www.digikey.com/en/products/detail/abracon-llc/ABM8AIG-16-000MHZ-12-2Z-T3/5817586, ESR=70R, Part Number=ABM8AIG-16.000MHZ-12-2Z-T3

## Via types
v1: diameter 0.585, hole 0.25, Top Layer to Bottom Layer, 8 vias

## Nets (pads, with @x,y where several pads share a name; then routed paths per layer and width w, separated by ;. In a path a pad name is that pad's centre, name@x,y a point inside that pad or via, vN(x,y) a via of type N, cw(c..) or ccw(c..) an arc to the next point about the centre after c; other vN are vias at no path point)
0V: 0V.1 C28.1 C29.1 R16.1 U6.3 U7.2 U8.1 | length 44.7
  Top Layer w0.254: R16.1 v1(19.685,-15.849) 22.251,-18.415 U7.2 ; U6.3 49.149,-20.32 48.566,-20.903 C28.1 46.882,-23.006 47.752,-23.876 v1(49.403,-23.876) 51.689,-23.876 0V.1 ; C29.1 59.309,-21.717 v1(61.087,-19.939) U8.1
"0V (ISO)": "0V ISO.1" "PCB NTC1.1" BOOT1.5 BOOT1.6 C1.1 C2.1 C3.1 C4.1 C9.1 C10.1 C11.1 C12.1 C13.1 C14.1 C15.1 C16.1 C17.1 C30.1 C31.1 C32.1 C33.1 K1.2 P1.2 P1.4 P1.6 P1.8 P1.10 P1.12 P1.14 P1.16 P1.18 P1.20 P2.1 P2.3 P2.5 P2.7 P2.9 P2.11 P2.13 R1.1 R2.1 R5.1 R6.1 R7.1 R8.1 R17.1 R23.1 R24.1 R25.1 SERIAL1.4 STLINK1.3 STLINK1.4 U1.12 U1.18 U1.31 U1.63 U2.2 U3.1 U3.3 U3.7 U3.9 U3.10 U8.4 | length 15.3
  Top Layer w0.254: U8.4 68.707,-18.288 69.723,-19.304 72.644,-19.304 74.041,-17.907 v1(74.041,-14.605) C30.1
"0V (ISO) (Crystal HS)": C5.1 C6.1 R5.2 R6.2 X2.GND
"0V (ISO) (Crystal LS)": C7.1 C8.1 R7.2 R8.2
"3.3V (ISO)": BOOT1.1 BOOT1.2 C1.2 C2.2 C3.2 C4.2 C11.2 C31.2 C32.2 L3.2 R3.2 R9.2 R10.2 R21.2 R22.2 SERIAL1.1 STLINK1.7 STLINK1.8 U1.1 U1.19 U1.32 U1.48 U1.64 U2.5
5V: 5V.1 C29.2 D6.A U7.3 U8.2 | length 29
  Top Layer w0.254: v1(6.705,-15.901) D6.A ; 5V.1 U7.3 37.465,-15.875 38.481,-14.859 v1(38.481,-13.589) ; C29.2 64.262,-23.622 65.278,-22.606 65.278,-21.59 64.357,-20.669 v1(63.627,-19.939) U8.2
"5V (ISO)": "5V ISO.1" C12.2 C14.2 C15.2 C16.2 C17.2 C30.2 D7.A R26.2 STLINK1.9 STLINK1.10 U2.1 U2.3 U3.6 U3.8 U8.5 | length 13.8
  Top Layer w0.254: U8.5 68.707,-2.794 69.723,-1.778 72.39,-1.778 74.041,-3.429 v1(74.041,-5.08) C30.2
12V/24V: C28.2 U6.2 U7.1 | length 19.2
  Top Layer w0.254: U7.1 38.1,-20.955 39.116,-19.939 39.116,-17.145 40.386,-15.875 U6.2 42.929,-20.323 43.434,-20.828 44.907,-20.828 C28.2
BOOT0: BOOT1.3 R1.2 R20.1
BOOT1: BOOT1.4 R2.2 R11.2
"CAN RX": R9.1 U1.57
"CAN RX INDC": D3.A U1.27
"CAN TX": R10.1 U1.58
"CAN TX INDC": D2.A U1.26
CANL: "CAN TERM R2.1" C25.2 U5.2
CANRX: RX.1 U3.4
CANS: C18.1 C19.1 C20.1 C21.1 C22.1 C23.1 C24.1 C25.1 C26.1 R15.1 U3.11 U3.13 U3.16 U3.20 U4.3
CANTX: TX.1 U3.5
GLV+: +.1 F1.1
GLV-: -.1 C27.1 U6.4 | length 10.7
  Top Layer w0.254: C27.1 48.361,-4.165 49.149,-4.953 U6.4 -.1
GPIO1: P1.1
GPIO2: P1.3
GPIO3: P1.5
GPIO4: P1.7
GPIO5: P1.9
GPIO6: P1.11
GPIO7: P1.13
GPIO8: P1.15
GPIO9: P1.17
GPIO10: P1.19
GPIO11: P2.2
GPIO12: P2.4
GPIO13: P2.6
GPIO14: P2.8
GPIO15: P2.10
GPIO16: P2.12
GPIO17: P2.14
NetC6_2: C6.2 R4.1 X2.2
NetC9_2: C9.2 U1.47
NetC10_2: C10.2 U1.30
NetC13_2: C13.2 U2.4
NetC18_2: C18.2 C19.2 C20.2 C21.2 U3.12 U3.19
NetC22_2: "CANH TP1.1" C22.2 U3.17 U4.2 U5.4
NetC23_2: "CANL TP1.1" C23.2 U3.15 U4.1 U5.3
NetC24_2: "CAN TERM R1.2" C24.2 U5.1
NetC26_2: "CAN TERM R1.1" "CAN TERM R2.2" C26.2
NetC27_2: C27.2 D5.K U6.1 | length 12.3
  Top Layer w0.254: D5.K U6.1 43.053,-8.131 43.053,-4.953 43.841,-4.165 C27.2
NetD2_K: D2.K R24.2
NetD3_K: D3.K R25.2
NetD5_A: D5.A F1.2 | length 7.1
  Top Layer w0.254: F1.2 D5.A
NetD6_K: D6.K R16.2 | length 3.6
  Top Layer w0.254: D6.K 11.251,-15.875 14.784,-15.875 R16.2
NetD7_K: D7.K R17.2
NetL3_1: L3.1 U1.13
NetLED1_K: LED1.K R23.2
NetR11_1: R11.1 U1.28
NetR15_2: R15.2 U3.18
NetR20_2: R20.2 U1.60
NRST: K1.4 R3.1 STLINK1.1 U1.7
PA5: LED1.A U1.21
"PCB TEMP": "PCB NTC1.2" C33.2 R26.1 U1.14
SCL: R22.1 U1.61
SDA: I1.2
SPI_MISO: U1.35
SPI_MOSI: U1.36
SPI_NSS: U1.33
SPI_SCLK: U1.34
SWCLK: STLINK1.6 U1.49
SWDIO: STLINK1.2 U1.46
UARTRX: SERIAL1.3 U1.17
UARTTX: SERIAL1.2 U1.16
XTALA: C5.2 U1.5 X2.1
XTALB: R4.2 U1.6
XTALC: C7.2 U1.3 X1.1
XTALD: C8.2 U1.4 X1.2
pads on no net: I1.1 K1.1 K1.3 R21.1 STLINK1.5 U1.2 U1.8 U1.9 U1.10 U1.11 U1.15 U1.20 U1.22 U1.23 U1.24 U1.25 U1.29 U1.37 U1.38 U1.39 U1.40 U1.41 U1.42 U1.43 U1.44 U1.45 U1.50 U1.51 U1.52 U1.53 U1.54 U1.55 U1.56 U1.59 U1.62 U3.2 U3.14 U8.8

## Polygon pours and split planes (outlines as drawn)
"0V (ISO)" on Int1 (GND) (split plane): 66.259,-0.547 66.214,-0.657 66.186,-0.771 66.177,-0.889 66.177,-24.765 66.186,-24.883 66.214,-24.997 66.259,-25.107 66.314,-25.197 53.286,-38.225 0.637,-38.225 0.637,-0.51 66.281,-0.51
"0V (ISO)" on Int1 (GND) (split plane): 99.566,-49.528 0.637,-49.528 0.637,-38.483 53.34,-38.483 53.39,-38.474 53.432,-38.446 66.497,-25.38 66.587,-25.435 66.697,-25.48 66.811,-25.508 66.929,-25.517 67.047,-25.508 67.161,-25.48 67.271,-25.435 67.371,-25.374 67.461,-25.297 67.538,-25.207 67.599,-25.107 67.644,-24.997 67.672,-24.883 67.681,-24.765 67.681,-0.889 67.672,-0.771 67.644,-0.657 67.599,-0.547 67.577,-0.51 99.566,-0.51
"5V (ISO)" on Int2 (PWR) (split plane): 66.32,-0.574 66.259,-0.674 66.214,-0.784 66.186,-0.898 66.177,-1.016 66.177,-24.765 66.186,-24.883 66.214,-24.997 66.259,-25.107 66.314,-25.197 53.286,-38.225 0.637,-38.225 0.637,-0.51 66.374,-0.51
"5V (ISO)" on Int2 (PWR) (split plane): 99.566,-49.528 0.637,-49.528 0.637,-38.483 53.34,-38.483 53.39,-38.474 53.432,-38.446 66.497,-25.38 66.587,-25.435 66.697,-25.48 66.811,-25.508 66.929,-25.517 67.047,-25.508 67.161,-25.48 67.271,-25.435 67.371,-25.374 67.461,-25.297 67.538,-25.207 67.599,-25.107 67.644,-24.997 67.672,-24.883 67.681,-24.765 67.681,-1.016 67.672,-0.898 67.644,-0.784 67.599,-0.674 67.538,-0.574 67.484,-0.51 99.566,-0.51

## Other copper
Int1 (GND) (plane layer: these items are gaps in the copper):
  lines w0.254: 0.381,-38.354 53.34,-38.354 66.929,-24.765
  lines w1.5: 66.929,-24.765 66.929,-0.889
Int2 (PWR) (plane layer: these items are gaps in the copper):
  lines w0.254: 0.127,-38.354 53.34,-38.354 66.929,-24.765
  lines w1.5: 66.929,-24.765 66.929,-1.016

## Silkscreen, mask and mechanical layers (free items; w line width, h text height)
Mechanical 1:
  lines w0.254: 0.127,-50.038 0.127,0 100.076,0 100.076,-50.038